# Altium PCB STM32_DAQ_Control_Board.PcbDoc (part 2 of 2)
Units mm, origin at the board's own origin, x right, y up, seen from the top; angles counter-clockwise.
Board outline 59.56 x 60 mm, 2 copper layers (Top Layer, Bottom Layer); 78 components, 52 nets, 252 pads, 265 vias.
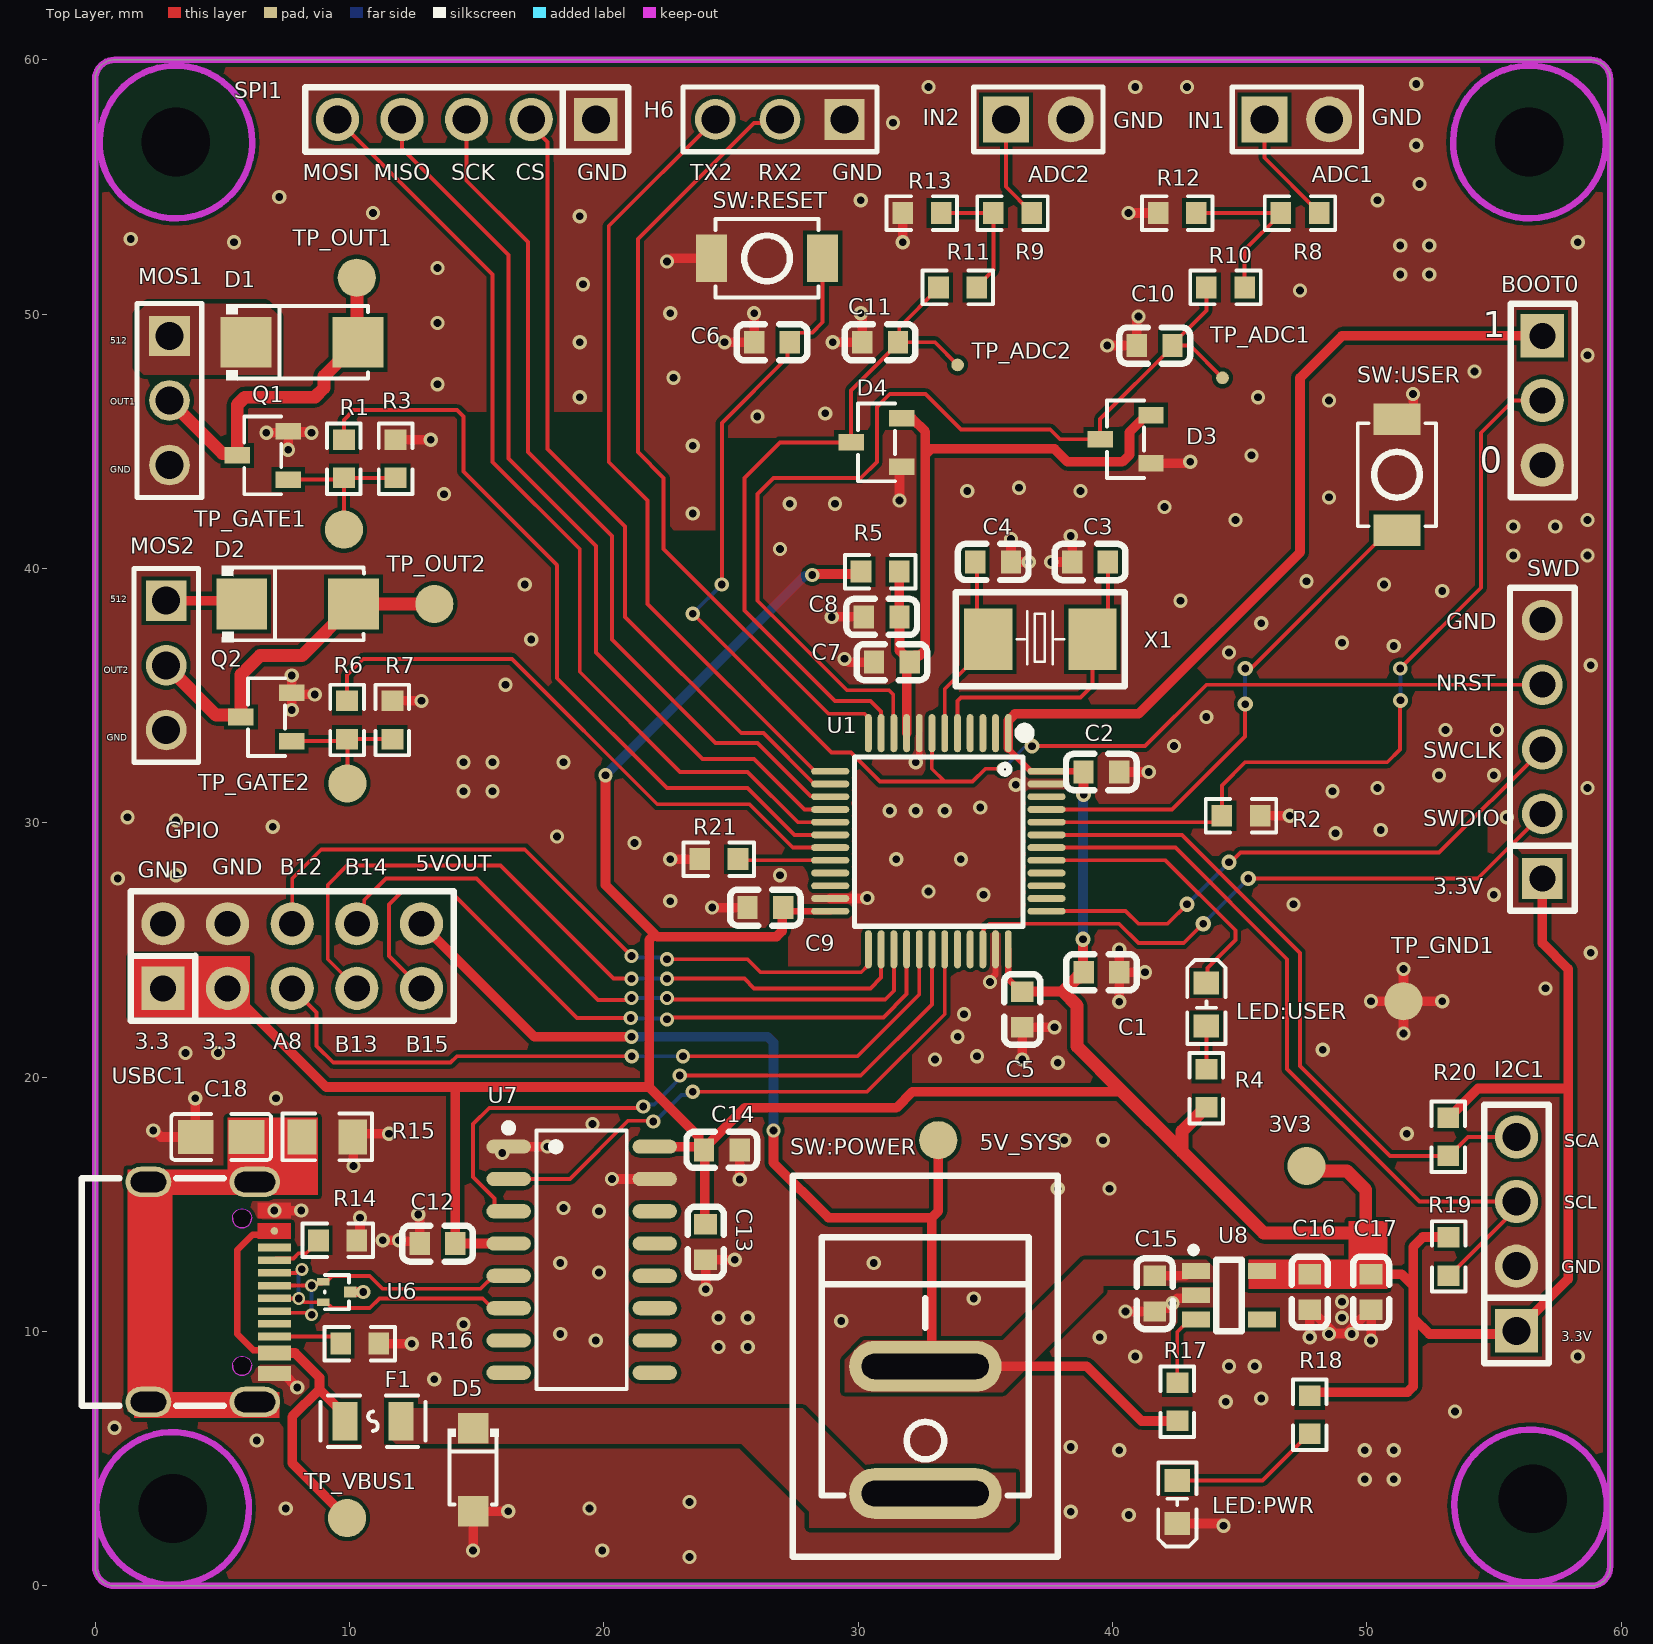
[diagram p0: Top Layer view]

## Via types
v1: diameter 0.559, hole 0.305, Top Layer to Bottom Layer, tented both sides, 250 vias
v2: diameter 0.6, hole 0.3, Top Layer to Bottom Layer, tented both sides, 10 vias
v3: diameter 0.5, hole 0.3, Top Layer to Bottom Layer, tented both sides, 5 vias

## Nets (pads, with @x,y where several pads share a name; then routed paths per layer and width w, separated by ;. In a path a pad name is that pad's centre, name@x,y a point inside that pad or via, vN(x,y) a via of type N, cw(c..) or ccw(c..) an arc to the next point about the centre after c; other vN are vias at no path point) (continued)
NetLED1_1: LED:USER.1 R4.1 | length 1.7
  Top Layer w0.152: R4.1 LED:USER.1
NetLED2_1: LED:PWR.1 R18.1 | length 6
  Top Layer w0.152: LED:PWR.1 45.898,4.153 47.724,5.979 R18.1
NetR8_1: ADC1.1 R8.1 | length 4.6
  Top Layer w0.152: ADC1.1 45.974,56.152 48.123,54.003 R8.1
NetR8_2: R8.2 R10.2 R12.1 | length 6.8
  Top Layer w0.152: R12.1 R8.2 46.617,53.947 45.194,52.525 R10.2
NetR9_1: ADC2.1 R9.1 | length 4.1
  Top Layer w0.152: ADC2.1 35.814,55.009 36.82,54.003 R9.1
NetR9_2: R9.2 R11.2 R13.1 | length 5.2
  Top Layer w0.152: R13.1 R9.2 35.314,51.732 34.663,51.082 R11.2
NetR14_2: R14.2 USBC1.A5 | length 2.1
  Top Layer w0.152: USBC1.A5 7.115,12.876 7.796,12.876 8.001,13.081 8.301,13.081 8.664,13.444 R14.2@8.664,13.589 ; R14.2@8.537,13.561 R14.2@8.537,13.589
NetR16_2: R16.2 USBC1.B5 | length 2.7
  Top Layer w0.152: USBC1.B5 9.37,9.807 R16.2
NetR17_2: R17.2 U8.3 | length 2.9
  Top Layer w0.152: R17.2 42.545,9.99 43.035,10.48 U8.3
NetR21_2: R21.2 U1.20 | length 3.6
  Top Layer w0.152: R21.2 25.319,28.529 U1.20
NetSW1_1: SW:USER.1 U1.45 | length 19.9
  Top Layer w0.152: U1.45 42.339,30.528 45.212,33.401 v2(45.212,34.671) ; v2(45.212,36.068) 45.259,36.115 45.478,36.115 50.866,41.504 SW:USER.1
  Bottom Layer w0.152: v2(45.212,34.671) v2(45.212,36.068)
NRST: C6.2 SW:RESET.2 SWD.4 U1.7 | length 56.2
  Top Layer w0.152: v1(23.495,38.227) 28.956,32.766 29.718,32.766 30.861,31.623 33.401,31.623 ; v1(24.638,39.37) 24.638,45.72 27.224,48.306 27.224,48.809 C6.2 27.31,48.945 27.634,49.268 28.186,49.268 28.6,49.682 SW:RESET.2 ; U1.7 32.901,32.498 32.893,32.491 32.893,32.131 33.401,31.623 ; v3(35.687,32.131) 35.003,32.131 34.495,31.623 33.401,31.623 ; v2(36.83,33.02) 41.275,33.02 43.688,35.433 SWD.4
  Bottom Layer w0.152: v1(23.495,38.227) v1(24.638,39.37) ; v3(35.687,32.131) 36.529,32.973 36.783,32.973 v2(36.83,33.02)
PA8: GPIO.5 U1.29 | length 29.5
  Top Layer w0.152: GPIO.5 8.702,22.54 8.702,21.233 9.36,20.574 13.97,20.574 14.224,20.828 v1(21.095,20.828) ; v1(23.114,20.828) 29.972,20.828 32.4,23.256 U1.29
  Bottom Layer w0.152: v1(21.095,20.828) v1(23.114,20.828)
PB12: GPIO.6 U1.25 | length 27.6
  Top Layer w0.152: GPIO.6 7.747,27.813 8.89,28.956 16.891,28.956 v1(21.082,24.765) ; v1(22.479,24.638) 25.654,24.638 26.162,24.13 30.118,24.13 30.401,24.413 U1.25
  Bottom Layer w0.152: v1(21.082,24.765) 21.145,24.701 22.415,24.701 v1(22.479,24.638)
PB13: GPIO.7 U1.26 | length 29.9
  Top Layer w0.152: GPIO.7 9.144,24.638 9.144,27.559 9.906,28.321 15.93,28.321 20.375,23.876 v1(21.082,23.876) ; v1(22.479,23.876) 25.527,23.876 25.908,23.495 30.48,23.495 30.902,23.917 U1.26
  Bottom Layer w0.152: v1(21.082,23.876) v1(22.479,23.876)
PB14: GPIO.8 U1.27 | length 26
  Top Layer w0.152: GPIO.8 10.58,26.328 10.58,26.963 11.43,27.813 14.995,27.813 19.767,23.041 21.009,23.041 v1(21.082,23.114) ; v1(22.479,23.114) 22.53,23.063 31.064,23.063 31.402,23.401 U1.27
  Bottom Layer w0.152: v1(21.082,23.114) v1(22.479,23.114)
PB15: GPIO.9 U1.28 | length 28.6
  Top Layer w0.152: GPIO.9 11.557,24.765 11.557,26.797 12.065,27.305 13.97,27.305 18.945,22.33 v1(21.06,22.33) ; v1(22.479,22.276) 22.555,22.352 30.988,22.352 31.902,23.266 U1.28
  Bottom Layer w0.152: v1(21.06,22.33) 21.088,22.303 22.452,22.303 v1(22.479,22.276)
SHIELD: C18.2 R15.2 USBC1.1 USBC1.2 USBC1.3 USBC1.4 | length 17.1
  Top Layer w0.381: USBC1.2@2.162,7.135 USBC1.3@2.162,15.784 ; USBC1.2@2.197,7.231 USBC1.1@6.396,7.231 ; USBC1.3@2.197,15.883 6.396,15.883 USBC1.4@6.364,15.914
SPI1_CS: SPI1.2 U1.14 | length 31.9
  Top Layer w0.152: SPI1.2 17.145,57.403 17.78,56.768 17.78,44.704 20.828,41.656 20.828,38.1 25.4,33.528 26.272,33.528 28.271,31.529 U1.14
SPI1_MISO: SPI1.4 U1.16 | length 35.9
  Top Layer w0.152: SPI1.4 12.065,56.515 16.256,52.324 16.256,44.323 19.685,40.894 19.685,36.703 23.876,32.512 25.908,32.512 27.892,30.528 U1.16
SPI1_MOSI: SPI1.5 U1.17 | length 38
  Top Layer w0.152: SPI1.5 15.621,51.562 15.621,44.196 19.05,40.767 19.05,35.941 22.987,32.004 25.654,32.004 27.63,30.028 U1.17
SPI1_SCK: SPI1.3 U1.15 | length 34
  Top Layer w0.152: SPI1.3 14.605,55.245 17.018,52.832 17.018,44.577 20.32,41.275 20.32,37.211 24.384,33.147 26.035,33.147 28.131,31.051 28.878,31.051 U1.15
SWCLK: SWD.3 U1.37 | length 22.6
  Top Layer w0.152: U1.37 37.417,26.543 40.513,26.543 41.021,26.035 42.164,26.035 v2(42.926,26.797) ; v2(44.577,28.448) 44.644,28.448 45.025,28.829 52.832,28.829 SWD.3
  Bottom Layer w0.152: v2(42.926,26.797) v2(44.577,28.448)
SWDIO: SWD.2 U1.34 | length 25.3
  Top Layer w0.152: U1.34 34.924,25.052 34.924,25.805 35.155,26.035 40.259,26.035 41.021,25.273 42.799,25.273 v2(43.561,26.035) ; v2(45.339,27.813) 54.356,27.813 SWD.2
  Bottom Layer w0.152: v2(43.561,26.035) v2(45.339,27.813)
USART2_RX: H6.3 U1.13 | length 31.3
  Top Layer w0.152: H6.3 20.193,53.467 20.193,44.196 21.717,42.672 21.717,38.608 28.296,32.029 U1.13
USART2_TX: H6.2 U1.12 | length 31.6
  Top Layer w0.152: H6.2 26.784,57.518 25.895,57.518 21.336,52.959 21.336,44.577 22.352,43.561 22.352,40.767 28.829,34.29 30.254,34.29 30.401,34.142 U1.12
USB_DM: U6.2 U7.6 USBC1.A7 USBC1.B7 | length 12
  Top Layer w0.152: USBC1.A7 7.048,11.306 7.998,11.306 v3(8.001,11.303) 8.068,11.303 8.215,11.156 U6.2 9.072,11.156 9.305,10.922 10.795,10.922 11.176,11.303 15.24,11.303 15.621,10.922 U7.6 ; USBC1.B7 7.897,12.309 8.034,12.446 v3(8.128,12.446)
  Bottom Layer w0.152: v3(8.001,11.303) 8.001,12.225 8.128,12.352 v3(8.128,12.446)
USB_DP: U6.1 U7.5 USBC1.A6 USBC1.B6 | length 12.5
  Top Layer w0.152: USBC1.B6 7.112,10.742 8.341,10.742 8.415,10.668 v3(8.509,10.668) ; USBC1.A6 7.047,11.81 v3(8.509,11.811) v3(8.509,11.811) 8.603,11.811 8.677,11.885 8.903,11.885 U6.1 9.072,11.956 9.308,12.192 10.795,12.192 11.303,11.684 15.155,11.684 15.663,12.192 U7.5
  Bottom Layer w0.152: v3(8.509,10.668) v3(8.509,11.811)
VBUS_FUSED: D5.1 F1.1 SW:POWER.1
VBUS_RAW: F1.2 TP_VBUS1.1 USBC1.A4B9 USBC1.B4A9 | length 17.3
  Top Layer w0.254: 6.396,13.807 6.187,13.807 5.588,13.208 5.588,9.906 6.223,9.271 6.932,9.271 USBC1.B4A9 ; 6.537,13.949 7.037,13.949 USBC1.A4B9
  Top Layer w0.381: USBC1.B4A9 7.861,9.157 8.82,8.198 8.82,7.729 ; F1.2 9.822,6.727 8.82,7.729 ; TP_VBUS1.1 7.747,4.826 7.747,6.656 8.82,7.729
VDDA_3V3: C7.2 C8.2 D3.2 D4.2 R5.2 U1.9 | length 27.3
  Top Layer w0.381: R5.2 31.75,39.878 31.619,39.747 31.619,38.104 C8.2 31.623,36.773 31.902,36.493 U1.9 ; C7.2 32.024,36.372 32.234,36.581 32.416,36.581 32.639,36.804 32.639,44.481 ; D4.2@32.113,45.908 32.639,45.382 32.639,44.481 ; D3.2 41.336,46.035 40.663,45.362 40.663,44.473 40.386,44.196 38.227,44.196 37.719,44.704 32.862,44.704 32.639,44.481
VLOAD_EXT1: D1.1 MOS1.1
VLOAD_EXT2: D2.1 MOS2.1 | length 3
  Top Layer w0.381: MOS2.1 5.634,38.735 D2.1
pads on no net: U1.2 U1.3 U1.4 U1.21 U1.22 U1.32 U1.33 U1.38 U1.39 U1.40 U1.46 U7.7 U7.8 U7.9 U7.10 U7.11 U7.12 U7.13 U7.14 U8.4 USBC1.A8 USBC1.B8

## Polygon pours and split planes (outlines as drawn)
GND on Top Layer "GND_L01_P005" (solid, remove dead copper, pour order 5): -4.889,59.309 -0.826,63.373 61.023,63.373 61.023,-2.794 59.118,-4.699 58.991,-4.572 -5.651,-4.572 -9.08,-1.143 -4.889,3.048
VBUS_FUSED on Top Layer "VBUS_FUSED_L01_P000" (solid, pour order 0): 11.557,7.239 11.811,6.985 27.813,6.985 30.353,4.445 36.195,4.445 36.195,2.54 35.941,2.286 28.067,2.286 28.067,2.921 25.4,5.588 11.811,5.588 11.557,5.842
+5V_SYS on Top Layer "+5V_SYS_L01_P001" (solid, remove dead copper, pour order 1): 29.464,8.89 30.226,9.652 35.687,9.652 38.862,12.827 43.688,12.827 43.942,12.573 43.942,11.938 42.545,11.938 42.418,11.811 39.624,11.811 39.624,11.557 35.687,7.62 29.464,7.62
VLOAD_EXT1 on Top Layer "VLOAD_EXT1_L01_P002" (solid, pour order 2): 1.651,50.038 2.032,50.419 6.731,50.419 7.239,49.911 7.239,47.625 1.905,47.625 1.651,47.879
GND on Bottom Layer "GND_L02_P006" (solid, remove dead copper, pour order 6): -2.413,62.484 63.881,62.484 63.881,-8.89 62.992,-9.779 62.103,-8.89 -8.636,-8.89 -8.636,56.261 -5.842,59.055

## Keep-outs
Top Layer:
  lines w0.254: 6.046,2.948 cw(c3.048,3.048) 6.048,3.048 ; 6.173,56.669 cw(c3.175,56.769) 6.175,56.769 ; 59.386,56.669 cw(c56.388,56.769) 59.388,56.769 ; 59.436,3.048 cw(c56.438,3.148) 59.438,3.148
Keep-Out Layer:
  the board outline again, w0.254

## Other copper
Top Layer:
  rectangle net SHIELD: 5.207,15.367 8.763,18.415
  rectangle net SHIELD: 1.27,15.367 7.112,16.383
  rectangle net SHIELD: 1.524,6.604 7.239,7.62
  rectangle net SHIELD: 1.27,6.858 3.048,16.383
  rectangle net 3.3V: 1.397,22.352 6.096,24.765
  rectangle net 3.3V: 45.339,11.684 50.8,12.827
  rectangle net 3.3V: 49.276,11.684 50.8,14.351
  pour cut-out: 32.131,20.955 32.131,19.781 31.986,19.781 31.351,19.146 31.097,19.4 30.651,19.4
  pour cut-out: 22.616,41.354 22.743,41.481 24.394,41.481 24.394,39.449 24.267,39.322 24.026,39.563 23.975,39.563 22.596,40.942
  pour cut-out: 36.029,34.161 36.068,34.122 36.068,32.893 41.148,32.893 43.688,35.433 43.688,35.687 43.243,36.131 41.052,33.94 36.303,33.94
  pour cut-out: 27.089,45.123 25.294,43.328 25.294,39.579 25.033,39.579 24.871,39.741 24.871,45.123
  pour cut-out: 45.025,28.829 52.832,28.829 54.356,30.353 54.737,30.353 54.737,27.864 54.521,27.648 44.92,27.648 45.025,27.753
  pour cut-out: 26.543,24.638 27.051,24.13 27.257,24.336 27.257,25.503 23.011,25.503 22.987,25.527 22.987,24.638
  pour cut-out: 14.643,46.139 20.104,46.139 20.193,46.228 20.447,45.974 20.447,43.942 21.717,42.672 21.717,38.608 26.289,34.036 23.622,31.369 21.844,31.369 21.844,32.004 18.161,35.687 18.161,40.132 14.478,43.815 14.693,44.03 14.693,46.063
  pour cut-out: 10.16,57.023 15.621,51.562 15.621,44.196 15.748,44.069 18.034,44.069 18.034,55.978 17.288,56.724 9.912,56.724

## Silkscreen, mask and mechanical layers (free items; w line width, h text height)
Top Overlay:
  text "IN2" at 32.537,57.429 h0.64
  text "GND" at 50.19,57.429 h0.64
  text "GND" at 40.03,57.302 h0.64
  text "IN1" at 42.951,57.302 h0.64
  text "MOSI" at 8.153,55.27 h0.64
  text "MISO" at 10.947,55.27 h0.64
  text "SCK" at 13.995,55.27 h0.64
  text "CS" at 16.535,55.27 h0.64
  text "GND" at 18.948,55.27 h0.64
  text "TX2" at 23.393,55.27 h0.64
  text "RX2" at 26.06,55.27 h0.64
  text "GND" at 28.981,55.27 h0.64
  text "1" at 54.559,49.098 h1.02
  text "512" at 0.584,48.844 h0.25
  text "OUT1" at 0.584,46.431 h0.25
  text "GND" at 0.584,43.764 h0.25
  text "0" at 54.432,43.764 h1.02
  text "512" at 0.584,38.684 h0.25
  text "GND" at 53.111,37.617 h0.64
  text "OUT2" at 0.33,35.89 h0.25
  text "NRST" at 52.73,35.204 h0.64
  text "GND" at 0.457,33.223 h0.25
  text "SWCLK" at 52.222,32.537 h0.64
  text "SWDIO" at 52.222,29.87 h0.64
  text "5VOUT" at 12.598,28.092 h0.64
  text "GND" at 4.597,27.965 h0.64
  text "B12" at 7.264,27.965 h0.64
  text "B14" at 9.804,27.965 h0.64
  text "GND" at 1.676,27.838 h0.64
  text "3.3V" at 52.603,27.203 h0.64
  text "3.3" at 1.549,21.107 h0.64
  text "3.3" at 4.216,21.107 h0.64
  text "A8" at 7.01,21.107 h0.64
  text "B13" at 9.423,20.98 h0.64
  text "B15" at 12.217,20.98 h0.64
  text "SCA" at 57.76,17.247 h0.51
  text "SCL" at 57.76,14.834 h0.51
  text "GND" at 57.633,12.294 h0.51
  text "3.3V" at 57.633,9.627 h0.38
Mechanical 1:
  the board outline again, w0.254